# Altium PCB TEST.PcbDoc
Units mm, origin at the board's own origin, x right, y up, seen from the top; angles counter-clockwise.
Board outline 129 x 95 mm, 2 copper layers (Top Layer, Bottom Layer); 10 components, 3 nets, 22 pads, 0 vias.
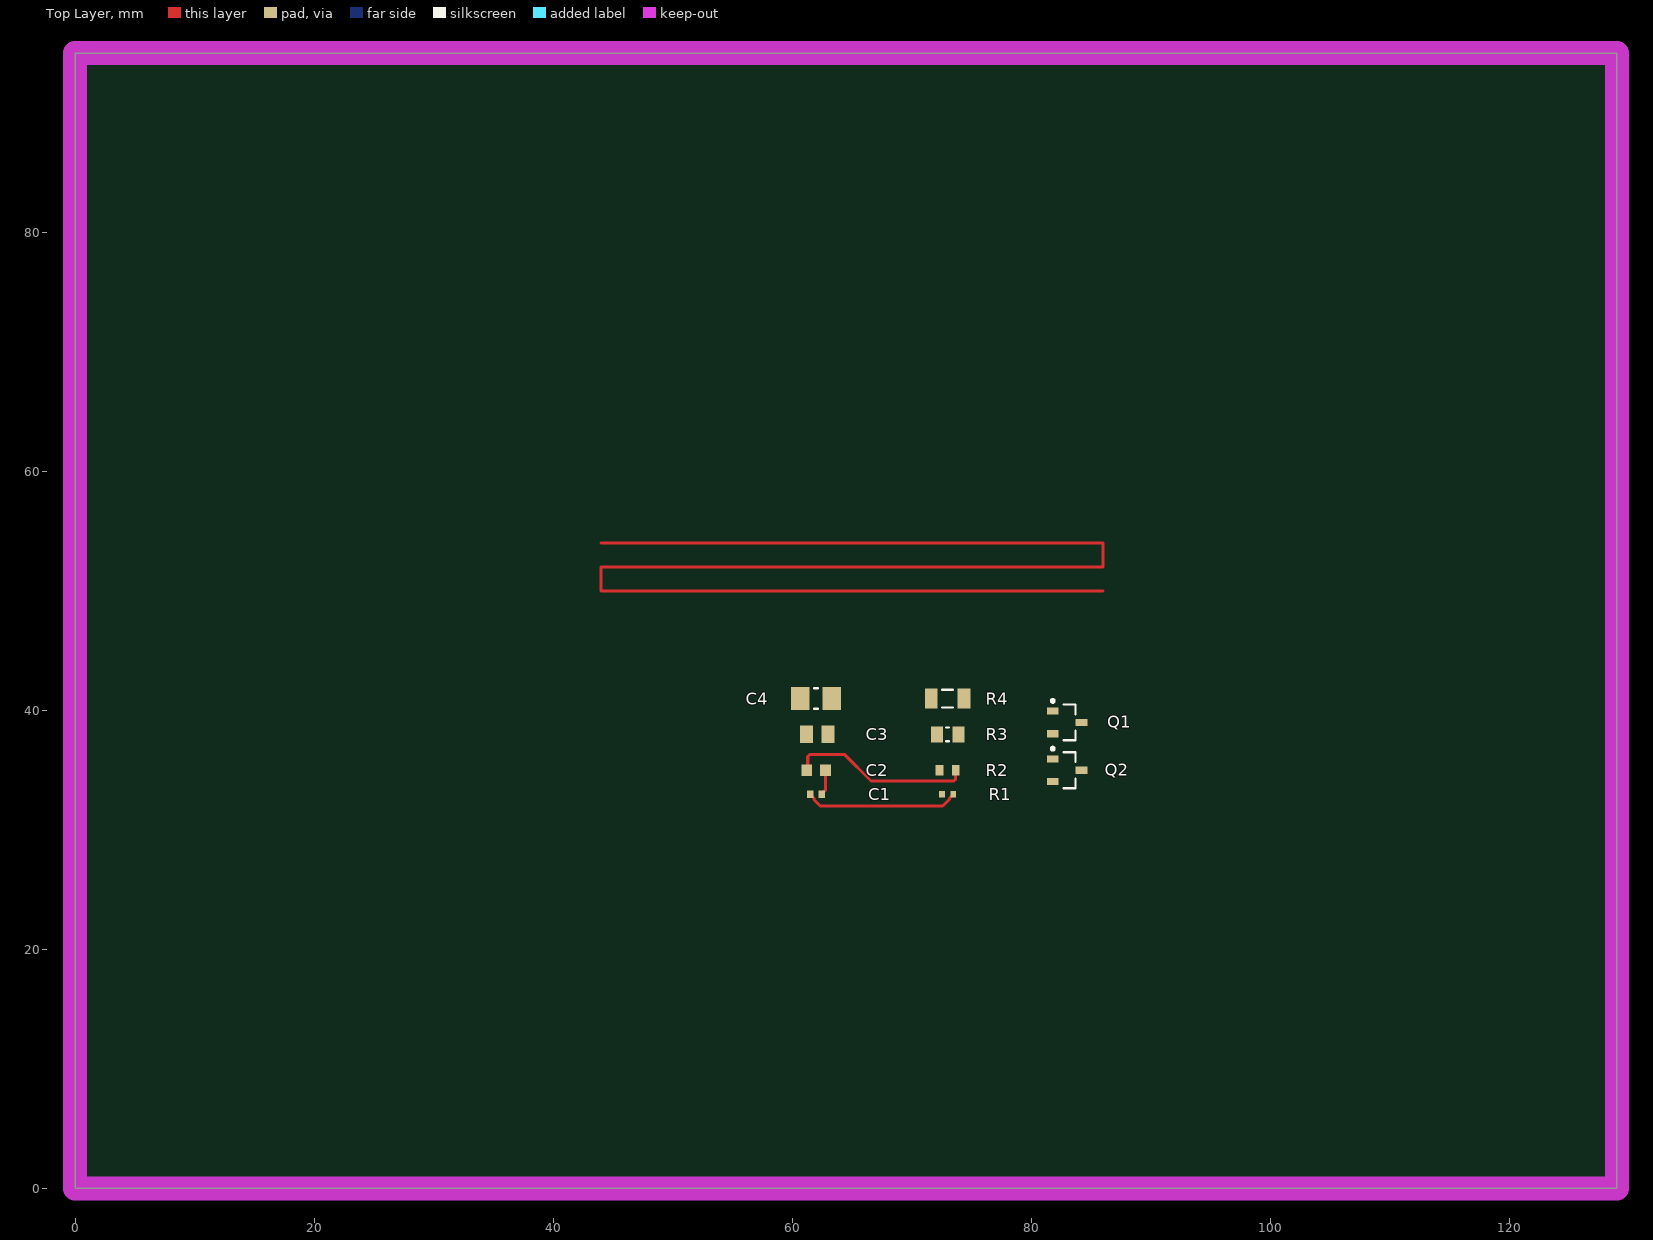
[diagram p0: Top Layer view]
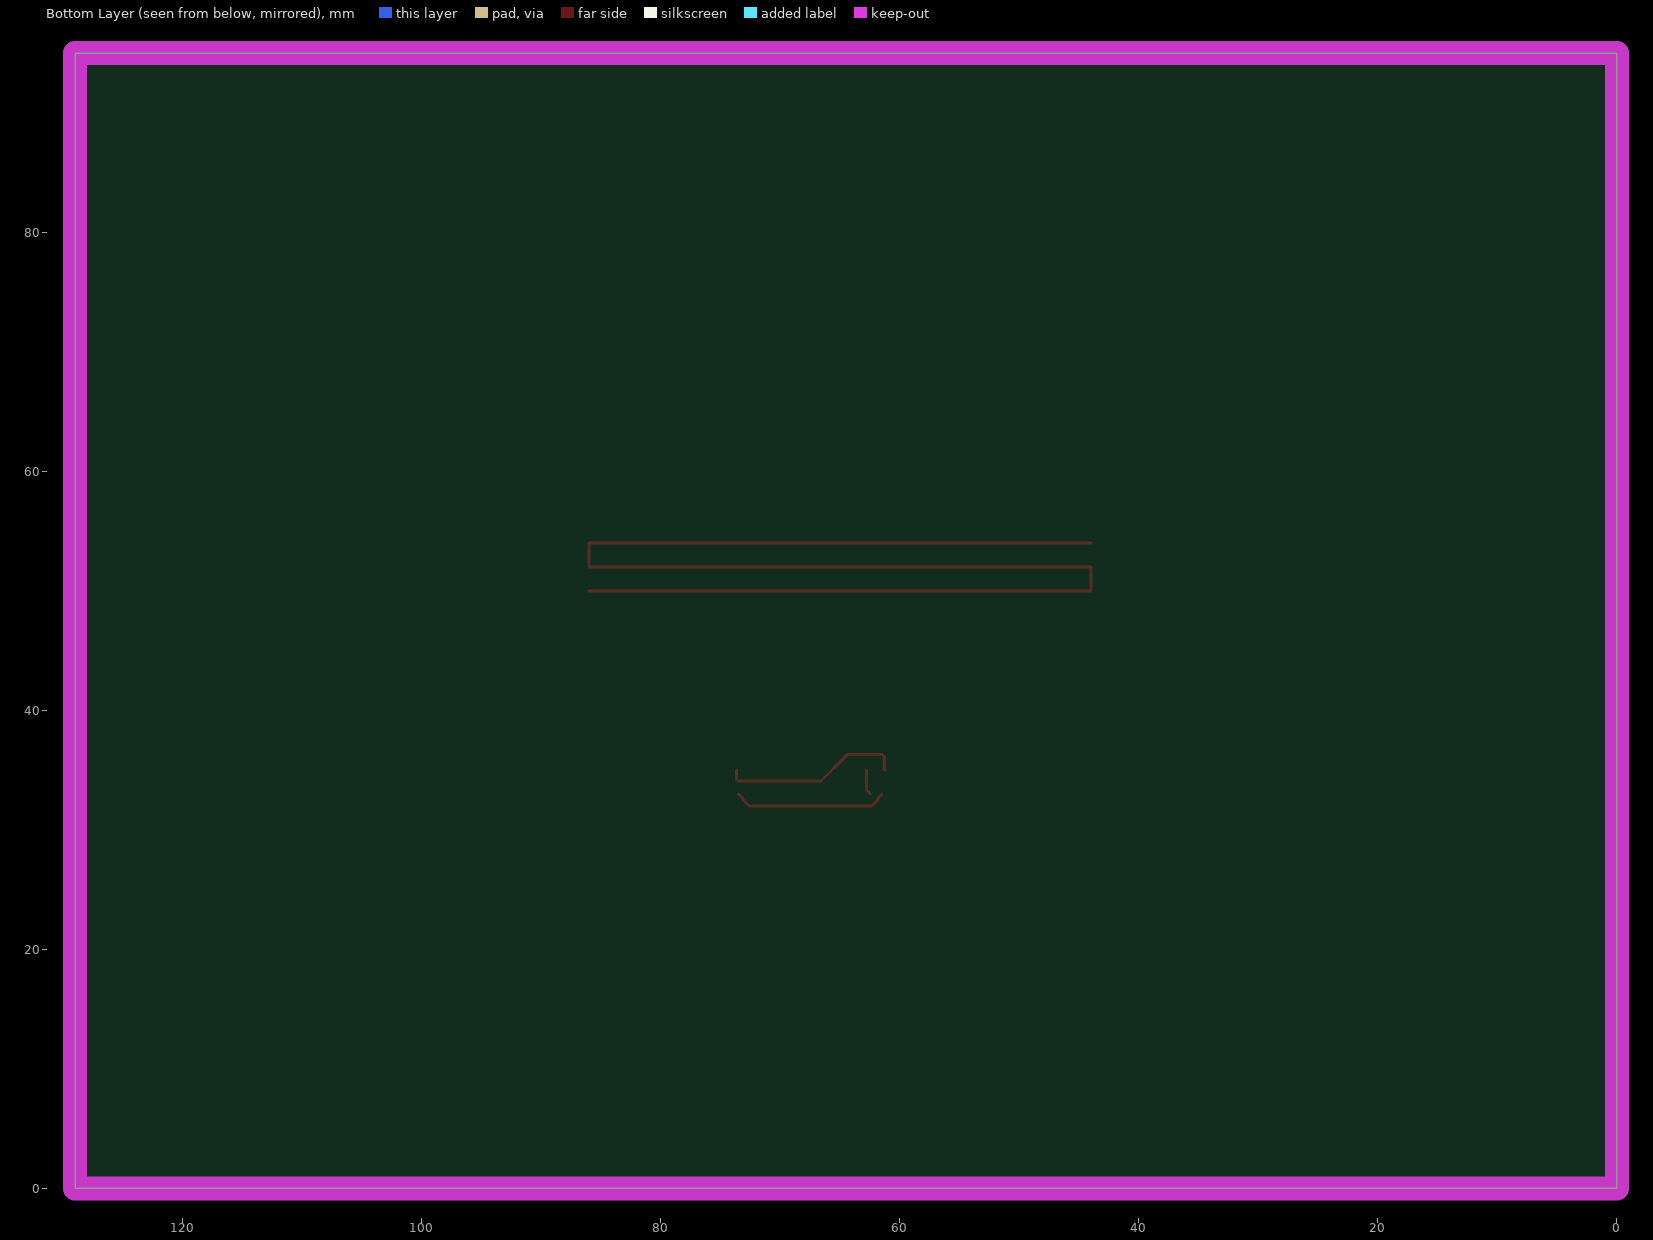
[diagram p1: Bottom Layer view, seen from below]
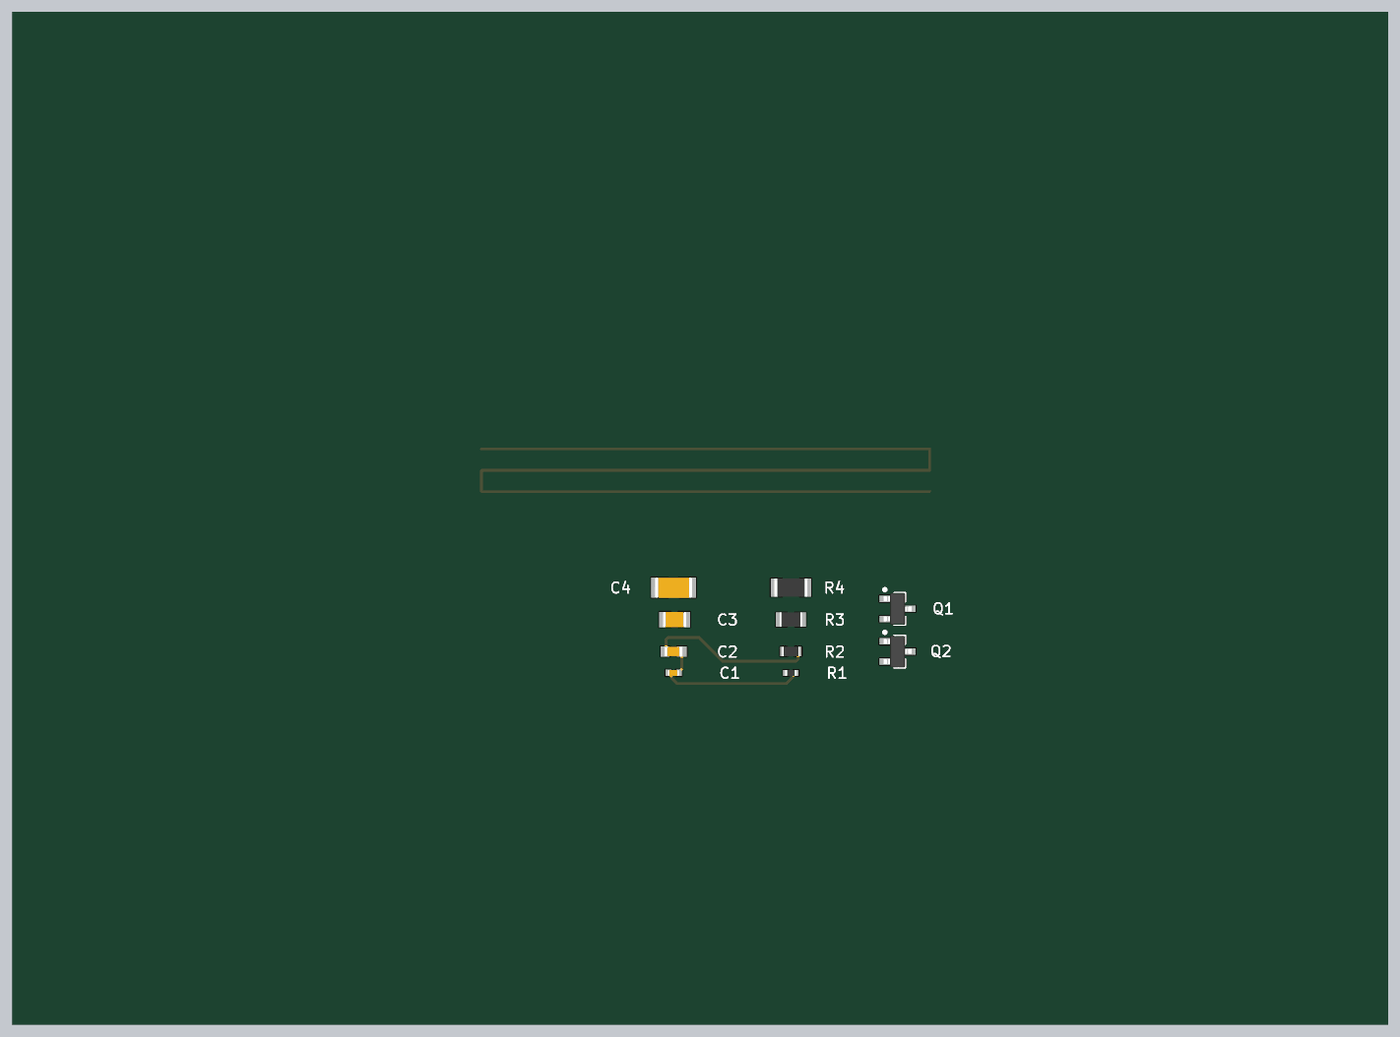
[diagram p2: 3D render of the assembled board from above, using the file's embedded part models]

## Layer stack, top to bottom
Top Solder: solder mask 0.0102, Solder Resist, Dk 3.5
Top Layer: signal copper 0.0356
Dielectric 1: dielectric 0.32, FR-4, Dk 4.8
Bottom Layer: signal copper 0.0356
Bottom Solder: solder mask 0.0102, Solder Resist, Dk 3.5

## Board outline
0,0 129,0 129,95 0,95

## Design rules (kind name [scope] priority, off if disabled: settings)
Clearance [All] p1: gap=0.254 ignorepadtopadclearanceinfootprint=FALSE except(0: Arc-Hole Track-Hole SMDPad-Hole THPad-Hole Via-Hole Fill-Hole Poly-Hole Region-Hole Text-Hole)
PolygonConnect [All] p1: connectstyle=Relief reliefconductorwidth=0.254 reliefentries=4 polygonreliefangle="90 Angle" airgapwidth=0.254
RoutingVias [All] p1: holewidth=0.711 width=1.27 viastyle="Through Hole" minholewidth=0.711 minwidth=1.27 maxholewidth=0.711 maxwidth=1.27
SolderMaskExpansion [All] p1: expansion=0.102 istentingtop=FALSE
Width [All] p1: maxlimit=0.254 minlimit=0.254 preferedwidth=0.254
30 further rules are at their usual default settings.

## Components (designator, comment, footprint, x,y, rotation, side; value= is the part's Value field where it differs from the comment)
C1 "C0402" CAPC1005X06N 62,33 r0 top
C2 "C0603" CAPC1608X09N 62,35 r0 top
C3 "C0805" CAPC2012X12N 62.1,38 r0 top
C4 "C1206" CAPC3216X19N 62,41 r0 top
Q1 "NPN SOT-23" SOT95P245X110-3N 83,39 r0 top
Q2 "PNP SOT-23" SOT95P245X110-3N 83,35 r0 top
R1 "R0402" RESC1005X04N 73,33 r0 top
R2 "R0603" RESC1608X06N 73,35 r0 top
R3 "R0805" RESC2012X06N 73,38 r0 top
R4 "R1206" RESC3016X06N 73,41 r0 top

## Footprints (in the part's own frame and the unit in brackets; to place one, negate y for a bottom-side part, rotate by r counter-clockwise, add the part's x,y. Pads: shape width x height; smd on the part's side, far side on the other; paste and mask are expansions set on the pad)
CAPC1005X06N [mm] "Chip Capacitor, 2-Leads, Body 1,00x0,50mm, IPC Medium Density"
  rect 0.56x0.62 smd: 1(-0.48,0) 2(0.48,0)
  body extent -0.53,-0.28 0.53,0.28, height 0.55
CAPC1608X09N [mm] "Chip Capacitor, 2-Leads, Body 1,60x0,80mm, IPC Medium Density"
  rect 0.9x0.95 smd: 1(-0.775,0) 2(0.775,0)
  body extent -0.85,-0.45 0.85,0.45, height 0.9
CAPC2012X12N [mm] "Chip Capacitor, 2-Leads, Body 2,00x1,25mm, IPC Medium Density"
  rect 1.1x1.45 smd: 1(-0.9,0) 2(0.9,0)
  body extent -1.1,-0.72 1.1,0.72, height 1.25
CAPC3216X19N [mm] "Chip Capacitor, 2-Leads, Body 3,20x1,60mm, IPC Medium Density"
  rect 1.55x1.9 smd: 1(-1.325,0) 2(1.325,0)
  silkscreen extent -0.15,-0.85 0.15,0.85, body extent -1.75,-0.95 1.75,0.95, height 1.9
RESC1005X04N [mm] "Chip Resistor, 2-Leads, Body 1,00x0,50mm, IPC Medium Density"
  rect 0.5x0.55 smd: 1(-0.475,0) 2(0.475,0)
  body extent -0.53,-0.28 0.53,0.28, height 0.4
RESC1608X06N [mm] "Chip Resistor, 2-Leads, Body 1,55x0,80mm, IPC Medium Density"
  rect 0.65x0.9 smd: 1(-0.675,0) 2(0.675,0)
  body extent -0.8,-0.45 0.8,0.45, height 0.55
RESC2012X06N [mm] "Chip Resistor, 2-Leads, Body 2,00x1,25mm, IPC Medium Density"
  rect 1x1.35 smd: 1(-0.9,0) 2(0.9,0)
  silkscreen extent -0.1,-0.58 0.1,0.58, body extent -1.05,-0.67 1.05,0.67, height 0.6
RESC3016X06N [mm] "Chip Resistor, 2-Leads, Body 3,05x1,60mm, IPC Medium Density"
  rect 1.05x1.7 smd: 1(-1.375,0) 2(1.375,0)
  silkscreen extent -0.45,-0.75 0.45,0.75, body extent -1.55,-0.85 1.55,0.85, height 0.65
SOT95P245X110-3N [mm] "SOT23, 3-Leads, Body 2,90x2,45mm, Pitch 0,95mm, IPC Medium Density"
  rect 1x0.6 smd: 1(-1.2,0.95) 2(-1.2,-0.95) 3(1.2,0)
  silkscreen extent -1.32,-1.5 0.7,1.92, body extent -1.3,-1.5 1.3,1.5, height 1.1

## Part data
C1: library part GEN0000007, "Generic capacitor C0402", Footprint_Name=C0402, ID=GEN0000007
C2: library part GEN0000008, "Generic capacitor C0603", Footprint_Name=C0603, ID=GEN0000008
C3: library part GEN0000009, "Generic capacitor C0805", Footprint_Name=C0805, ID=GEN0000009
C4: library part GEN0000010, "Generic capacitor C1206", Footprint_Name=C1206, ID=GEN0000010
Q1: library part GEN0000001, "Generic NPN BJT transistor SOT-23", Footprint_Name=SOT-23, ID=GEN0000001
Q2: library part GEN0000002, "Generic PNP BJT transistor SOT-23", Footprint_Name=SOT-23, ID=GEN0000002
R1: library part GEN0000003, "Generic resistor R0402", Footprint_Name=R0402, ID=GEN0000003
R2: library part GEN0000004, "Generic resistor R0603", Footprint_Name=R0603, ID=GEN0000004
R3: library part GEN0000005, "Generic resistor R0805", Footprint_Name=R0805, ID=GEN0000005
R4: library part GEN0000006, "Generic resistor R1206", Footprint_Name=R1206, ID=GEN0000006

## Nets (pads, with @x,y where several pads share a name; then routed paths per layer and width w, separated by ;. In a path a pad name is that pad's centre, name@x,y a point inside that pad or via, vN(x,y) a via of type N, cw(c..) or ccw(c..) an arc to the next point about the centre after c; other vN are vias at no path point)
NetC1_1: C1.1 R1.2 | length 12.9
  Top Layer w0.254: C1.1 61.52,32.97 61.819,32.671 61.819,32.532 62.351,32 72.589,32 73.156,32.567 73.156,32.656 73.475,32.975 R1.2
NetC1_2: C1.2 C2.2 | length 2.1
  Top Layer w0.254: C1.2 62.48,33.03 62.775,33.325 C2.2
NetC2_1: C2.1 R2.2 | length 15.3
  Top Layer w0.254: C2.1 61.3,35.075 61.3,36.151 61.449,36.3 64.4,36.3 66.6,34.1 73.526,34.1 73.675,34.249 R2.2
pads on no net: C3.1 C3.2 C4.1 C4.2 Q1.1 Q1.2 Q1.3 Q2.1 Q2.2 Q2.3 R1.1 R2.1 R3.1 R3.2 R4.1 R4.2
copper on no net: | length 130
  Top Layer w0.254: 44,54 86,54 86,52 44,52 44,50 86,50

## Keep-outs
Keep-Out Layer:
  the board outline again, w2